# Altium PCB Controller_sensor.PcbDoc
Units mil, origin at the board's own origin, x right, y up, seen from the top; angles counter-clockwise.
Board outline 1105 x 1090 mil, 2 copper layers (Top Layer, Bottom Layer); 19 components, 22 nets, 90 pads, 31 vias.
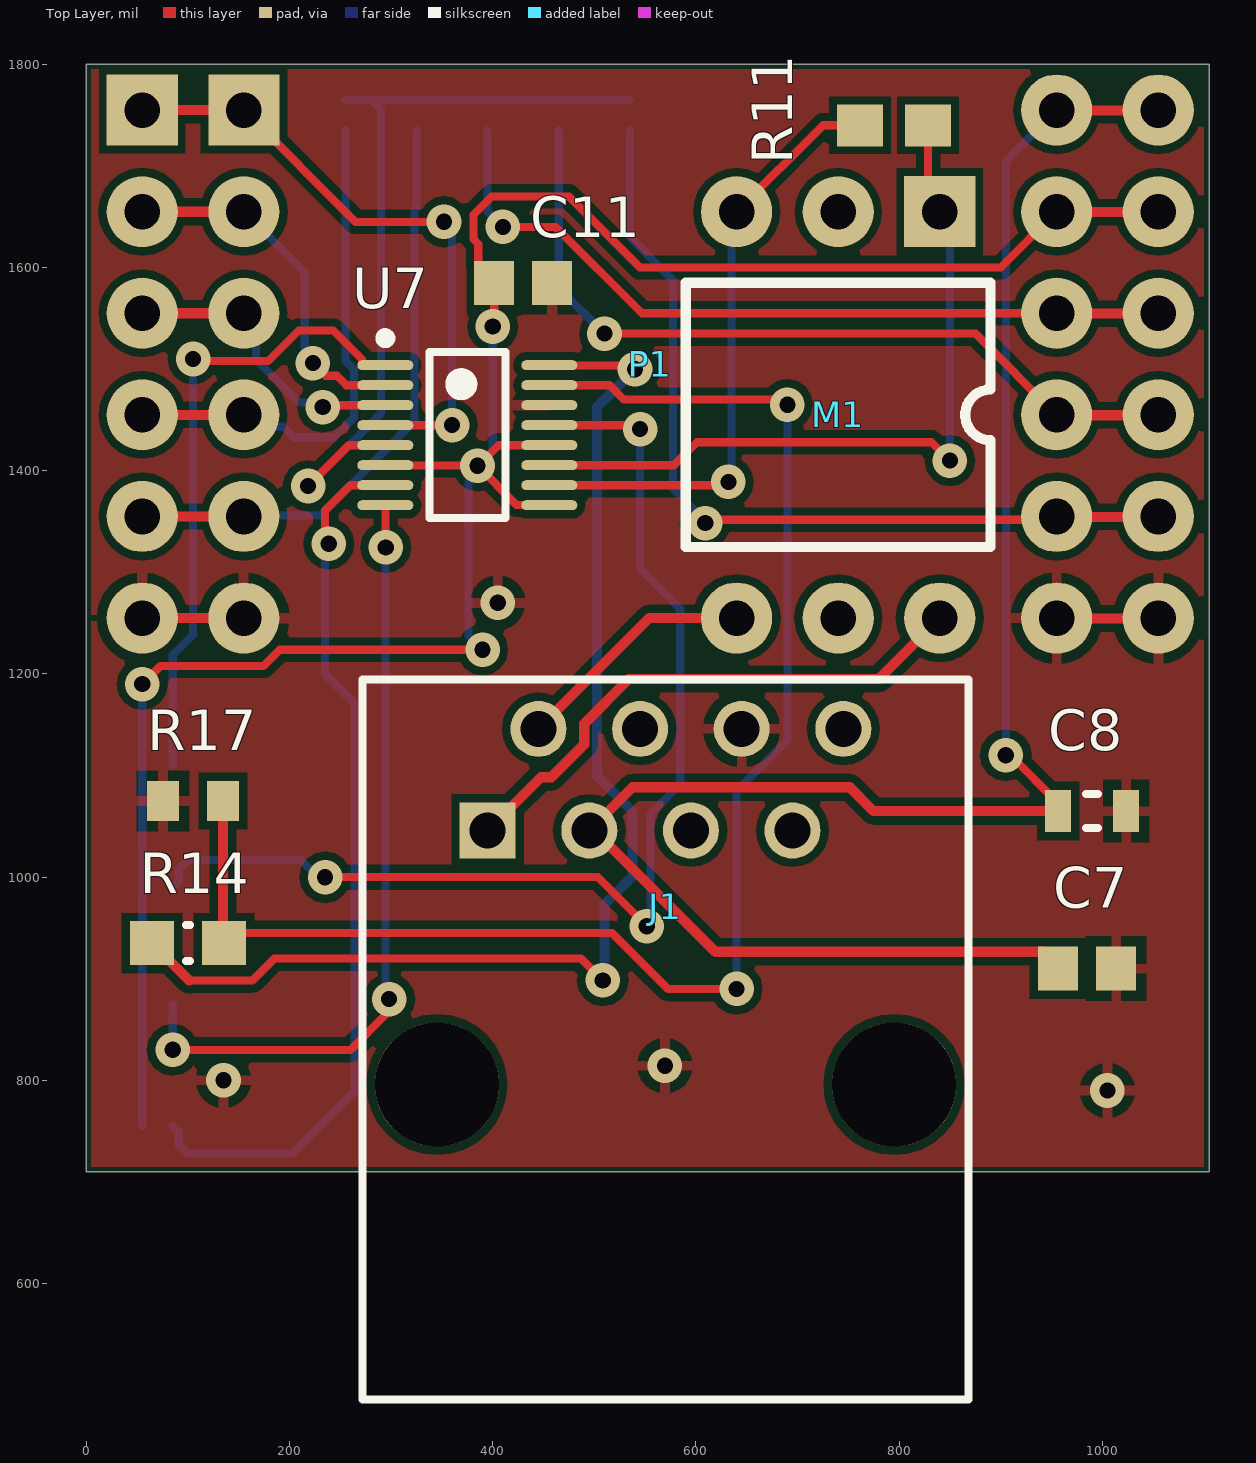
[diagram p0: Top Layer view]
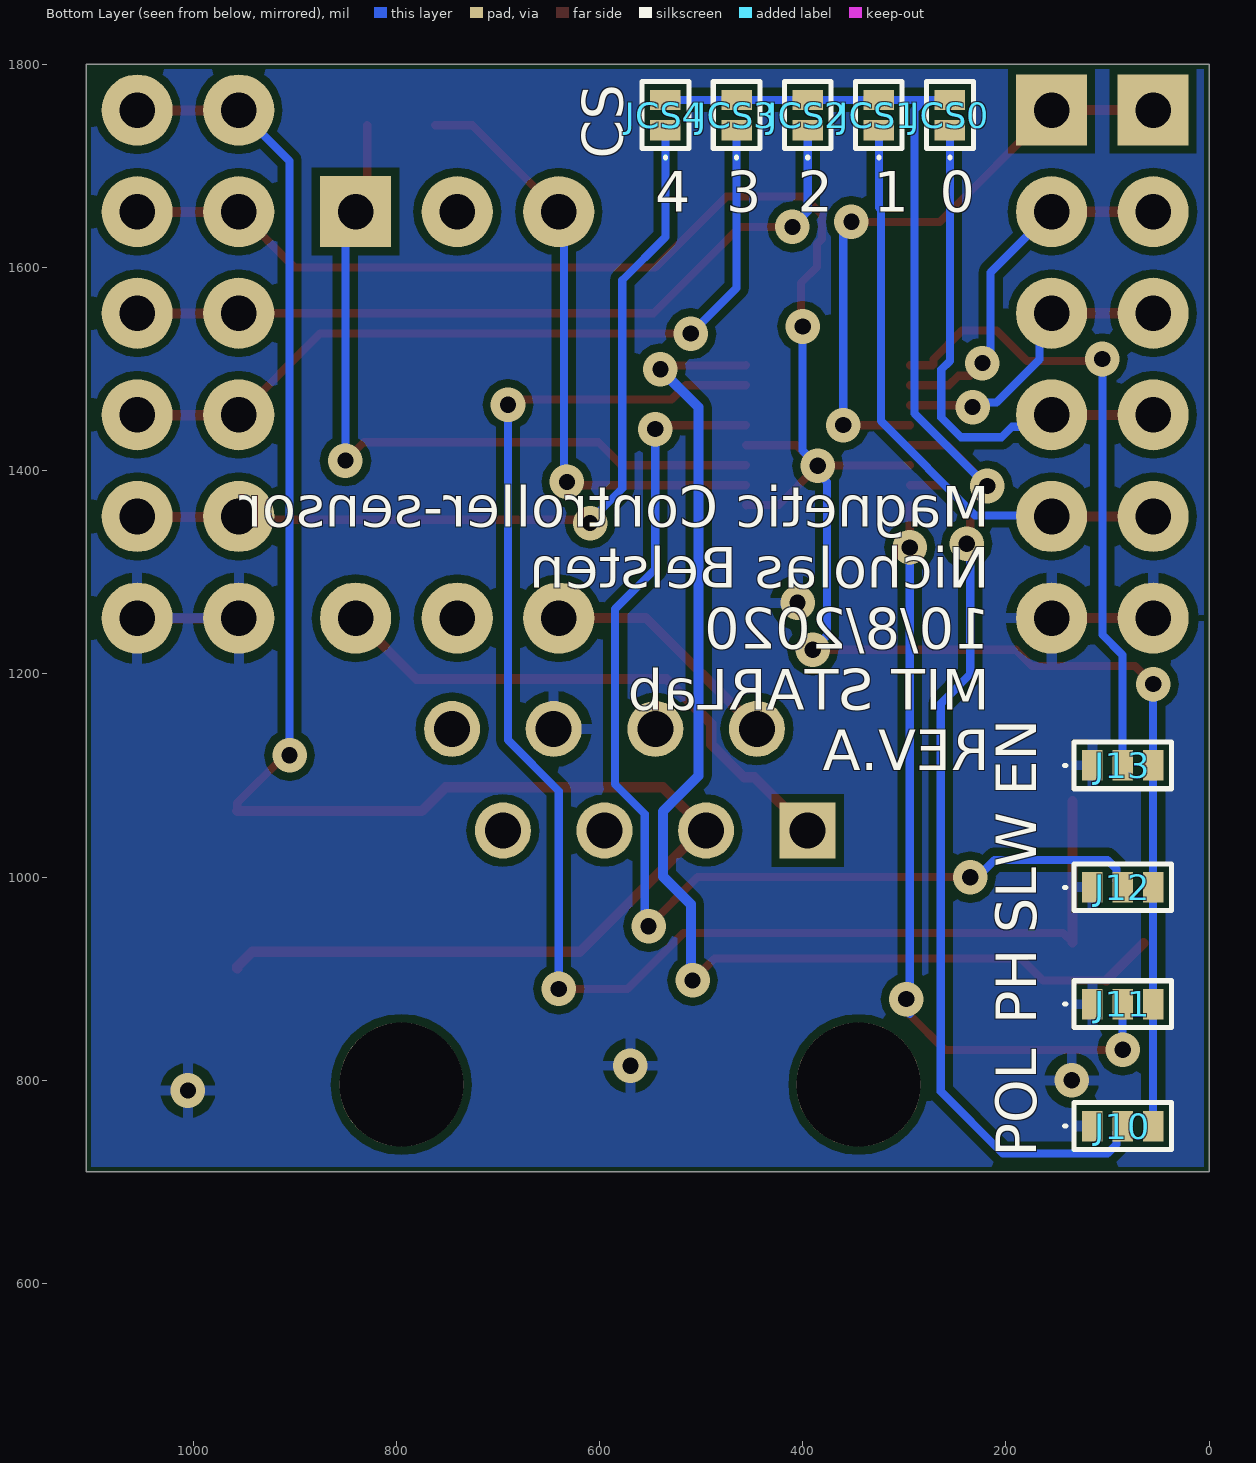
[diagram p1: Bottom Layer view, seen from below]

## Layer stack, top to bottom
Top Solder: solder mask 0.4, Solder Resist, Dk 3.5
Top Layer: signal copper 1.4
Dielectric 1: dielectric 12.6, FR-4, Dk 4.8
Bottom Layer: signal copper 1.4
Bottom Solder: solder mask 0.4, Solder Resist, Dk 3.5

## Board outline
0,710 1105,710 1105,1800 0,1800

## Design rules (kind name [scope] priority, off if disabled: settings)
Clearance [All] p1: gap=8 ignorepadtopadclearanceinfootprint=FALSE
ComponentClearance [All] p1: gap=0 collisioncheckmode=3 verticalgap=0 showdistances=FALSE
HoleSize [All] p1: absolutevalues=TRUE maxlimit=200 minlimit=10 maxpercent=80.000 minpercent=20.000
MinimumSolderMaskSliver [All] p1: minsoldermaskwidth=4
PolygonConnect [All] p1: connectstyle=Relief reliefconductorwidth=10 reliefentries=4 polygonreliefangle="90 Angle" airgapwidth=10
RoutingVias [All] p1: holewidth=16 width=34 viastyle="Through Hole" minholewidth=14 minwidth=30 maxholewidth=30 maxwidth=50
SilkToSilkClearance [All] p1: silktosilkclearance=5
SilkToSolderMaskClearance [IsPad] p1: minsilkscreentomaskgap=4 clearancetoexposedcopper=TRUE
SolderMaskExpansion SolderMaskExpansion_1 [InComponent('U7')] p1: expansion=2 istentingtop=FALSE
SolderMaskExpansion [All] p2: expansion=3 istentingtop=FALSE
Width [All] p1: maxlimit=20 minlimit=8 preferedwidth=10
25 further rules are at their usual default settings.

## Components (designator, comment, footprint, x,y, rotation, side; value= is the part's Value field where it differs from the comment)
C7 "0.1 uF" CAPC1608X87X35ML15T15 985,910 r180 top
C8 "10 uF" CAPC1608X90X20ML10 990,1065 r180 top
C11 "0.1 uF" CAPC1608X87X35ML15T15 430,1585 r180 top
J1 "615008137121" 615008137121 570,840 r0 top
J10 "solder_jumper_2" solder_jumper_2 85,755 r90 bottom
J11 "solder_jumper_2" solder_jumper_2 85,875 r90 bottom
J12 "solder_jumper_2" solder_jumper_2 85,990 r90 bottom
J13 "solder_jumper_2" solder_jumper_2 85,1110 r90 bottom
JCS0 "solder_jumper" solder_jumper 255,1785 r0 bottom
JCS1 "solder_jumper" solder_jumper 325,1785 r0 bottom
JCS2 "solder_jumper" solder_jumper 395,1785 r0 bottom
JCS3 "solder_jumper" solder_jumper 465,1785 r0 bottom
JCS4 "solder_jumper" solder_jumper 535,1785 r0 bottom
M1 "78613/3C" DIP6-400 840,1655 r270 top
P1 "dp12" "dp12-900 - double" 55,1755 r0 top
R11 "120" RESC1609X55X30ML15T15 795,1740 r0 top
R14 "2.8k" RESC0603(1608)_M 100,935 r0 top value="2800.00 Ohm"
R17 "1.2k" RESC1608X55X25ML10T15 105,1075 r0 top
U7 "LTC6820IMS#TRPBF" LT-MS-16_L 375,1435 r0 top

## Footprints (in the part's own frame and the unit in brackets; to place one, negate y for a bottom-side part, rotate by r counter-clockwise, add the part's x,y. Pads: shape width x height; smd on the part's side, far side on the other; paste and mask are expansions set on the pad)
615008137121 [mm] "Modular Jack THT Horizontal Plastic 8P8C Tab Down"
  rect 1.4x1.4 hole 0.9: 1(-4.445,5.23)
  round 1.4 hole 0.9: 2(-3.175,7.77) 3(-1.905,5.23) 4(-0.635,7.77) 5(0.635,5.23) 6(1.905,7.77) 7(3.175,5.23) 8(4.445,7.77)
  round 3.1 hole 3.1 unplated: MH1(-5.715,-1.12) MH2(5.715,-1.12)
  silkscreen extent -7.57,-9 7.57,9, body extent -7.57,-9 7.57,9, height 11.75
CAPC1608X87X35ML15T15 [mm] "Chip Capacitor, 2-Leads, Body 1.60x0.80mm, IPC Low Density"
  rect 1x1.1 smd: 1(-0.725,0) 2(0.725,0)
  body extent -0.87,-0.48 0.87,0.47, height 0.87
CAPC1608X90X20ML10 [mm] "Chip Capacitor, 2-Leads, Body 1.70x0.90mm, IPC Low Density"
  rect 0.65x1.05 smd: 1(-0.85,0) 2(0.85,0)
  silkscreen extent -0.15,-0.43 0.15,0.43, body extent -0.85,-0.45 0.85,0.45, height 0.9
DIP6-400 [mil]
  rect 70x70 hole 35: 1(0,0)
  round 70 hole 35: 2(0,-100) 3(0,-200) 4(400,-200) 5(400,-100) 6(400,0)
  silkscreen extent 70,-250 330,50, body extent 10,-275 390,65, height 250
"dp12-900 - double" [mil]
  rect 70x70 hole 35: 1(0,0) 1(100,0)
  round 70 hole 35: 2(0,-100) 2(100,-100) 3(0,-200) 3(100,-200) 4(0,-300) 4(100,-300) 5(0,-400) 5(100,-400) 6(0,-500) 6(100,-500) 7(900,-500) 7(1000,-500) 8(900,-400) 8(1000,-400) 9(900,-300) 9(1000,-300) 10(900,-200) 10(1000,-200) 11(900,-100) 11(1000,-100) 12(900,0) 12(1000,0)
  Top Layer lines w10: 0,-500 100,-500 ; 0,-400 100,-400 ; 0,-300 100,-300 ; 0,-200 100,-200 ; 0,-100 100,-100 ; 0,0 100,0 ; 900,-500.39 999.82,-500.39 ; 900,-400.39 999.82,-400.39 ; 900,-300.39 999.82,-300.39 ; 900,-200.39 999.82,-200.39 ; 900,-100.39 999.82,-100.39 ; 900,-0.39 999.82,-0.39
LT-MS-16_L [mm] "SOP, 16-Leads, Body 4.04x3.00mm, Pitch 0.50mm, IPC High Density"
  oval 1.4x0.25 smd: 1(-2.05,1.75) 2(-2.05,1.25) 3(-2.05,0.75) 4(-2.05,0.25) 5(-2.05,-0.25) 6(-2.05,-0.75) 7(-2.05,-1.25) 8(-2.05,-1.75) 9(2.05,-1.75) 10(2.05,-1.25) 11(2.05,-0.75) 12(2.05,-0.25) 13(2.05,0.25) 14(2.05,0.75) 15(2.05,1.25) 16(2.05,1.75)
  silkscreen extent -2.17,-2.08 0.95,2.55, body extent -1.55,-2.05 1.55,2.05, height 1.1
RESC0603(1608)_M [mm] "Chip Resistor, Body 1.6x0.8mm, IPC Low Density"
  rect 1.1x1.1 smd: 1(-0.9,0) 2(0.9,0)
  silkscreen extent -0.05,-0.45 0.05,0.45, body extent -0.85,-0.47 0.85,0.47, height 0.6
RESC1608X55X25ML10T15 [mm] "Chip Resistor, 2-Leads, Body 1.60x0.80mm, IPC Low Density"
  rect 0.8x1 smd: 1(-0.75,0) 2(0.75,0)
  body extent -0.85,-0.45 0.85,0.45, height 0.55
RESC1609X55X30ML15T15 [mm] "Chip Resistor, 2-Leads, Body 1.75x0.95mm, IPC Low Density"
  rect 1.15x1.05 smd: 1(-0.85,0) 2(0.85,0)
  body extent -0.87,-0.48 0.87,0.48, height 0.55
solder_jumper [mil]
  rect 30x20 smd: 0(0,20) 1(0,50)
  silkscreen extent -23,2 23,77
solder_jumper_2 [mil]
  rect 30x20 smd: 0(0,0) 1(0,30) 2(0,-30)
  silkscreen extent -23,-48 23,57

## Part data
C7 C11: library part CMP-2006-03300-1, Manufacturer=Kemet, Part Number=C0603X104K5RACTU
C8: library part CMP-2000-04979-1, "Chip Capacitor, 10 uF, +/- 10%, 10 V, -55 to 85 degC, 0603 (1608 Metric), RoHS, Tape and Reel", Capacitance=10µF, Manufacturer=TDK, Operating Temperature=-55degC~85degC, Package / Case=0603(1608Metric), Package Description="2-Pin Surface Mount Device, Body 1.6 x 0.8 mm", Package Reference=603, PCN Part Number=MLCCPartNumberChange30/Nov/2012, Ratings=-, Standard Package=1, Temperature Coefficient=X5R, Tolerance=±10%, Voltage - Rated=10V, Applications=GeneralPurpose, Category=Capacitors, Datasheet URL=http://download.siliconexpert.com/pdfs/2015/4/21/15/54/45/779/tdk_/manual/37024850441143360mlcc_commercial_general_en.pdf, Datasheet Version=Mar-15, Design Resources=20WNon-IsolatedBuckLEDDriverUsingPLLNK460KG, Family=CeramicCapacitors, Features=-, Height - Seated (Max)=-, Kits=445-9003-KIT-ND-KITCAPCERHICAPMLCCSMD, Lead Spacing=-, Lead Style=-, Manufacturer URL=http://www.tdk.com/, Mounting Type=SurfaceMount,MLCC, Online Catalog=CSeries,GeneralPurpose, Other Names=445-7486-1, Packaging=CutTape(CT), Product Training Modules=CSeriesGeneralApplicationsSEAT,CCV,andTVCLDesignToolsGuidetoReplacinganElectrolyticCapacitorwithanMLCC, RoHS Information=RoHSCertificate-MLCC, Series=C, Size / Dimension="0.063\"Lx0.031\"W(1.60mmx0.80mm)", Thickness (Max)="0.035\"(0.90mm)"
J1: library part CMP-1502-01679-1, "Modular Jack WR-MJ, Tab Down, Plastic, Horizontal Entry, THT, 8P8C", Contact Resistance=20mOhm, Manufacturer="Wurth Elektronik", Operating Temperature=-40to85degC, Rated Current=1.5A, Withstanding Voltage=1000VAC, Working Voltage=120VAC, Compliance=Leadfree/RoHS, Datasheet URL=https://katalog.we-online.com/em/datasheet/615008137121.pdf, Entrance=Horizontal, Manufacturer URL=http://www.we-online.de, Mounting Technology=THT, Package Reference=615008137121, Packaging=Tray, Part Number=615008137121, Pin Number=8P8C, Port=1x1, Publisher=WurthElektronik
R11: library part CMP-2100-03629-1, "Chip Resistor, 120 Ohm, +/- 1%, 0.1 W, -55 to 155 degC, 0603 (1608 Metric), RoHS, Tape and Reel", Case Code (Imperial)=0603, Case Code (Metric)=1608, Manufacturer=Panasonic, Max Operating Temperature=155degC, Max Power Dissipation=100mW, Min Operating Temperature=-55degC, Package Description="2-Pin Surface Mount Device, Body 1.6 x 0.85 mm", Package Quantity=1, Resistance=120Ohm, Temperature Coefficient=100ppm/degreesC, Tolerance=1%, Voltage Rating=75V, Case/Package=0603, Composition=ThickFilm, Contact Plating=Tin, Datasheet URL=https://industrial.panasonic.com/cdbs/www-data/pdf/RDA0000/AOA0000C283.pdf, Datasheet Version=42095.0, Depth=0.8mm, Height=0.022inch, Lead Free=LeadFree, Length=1.6mm, Manufacturer URL=http://www.panasonic.com/, Military Standard=Not, Mount=SurfaceMount, Number of Pins=2, Number of Terminations=2, Package Reference=0603, Package URL=http://www.st.com/st-web-ui/static/active/en/resource/technical/document/datasheet/CD00001320.pdf, Packaging=TapeandReel, Power Rating=100mW, Radiation Hardening=No, REACH SVHC=NoSVHC, RoHSCompliant=true, Termination=SMD/SMT, Voltage Rating (DC)=75V, Width=0.031inch
R14: library part CMP-1012-00559-1, "2K8 0.1W 1% 0603 (1608 Metric)  SMD", Case-EIA=0603, Case-Metric=1608, Power="0.1 W", Tolerance="1 %", Technology=SMT
R17: library part CMP-2000-04824-1, Manufacturer=Yageo, Part Number=AC0603FR-071K2L
U7: library part CMP-0937-00011-1, "IsoSPI Isolated Communication Interface, 2.7 to 5.5 V, -40 to 85 degC, 16-Pin MSOP (MS), Pb-Free, Tape and Reel", IO Supply Current="1 uA Max.", IO Supply Voltage Range="1.7 to 5.5 V", Manufacturer="Linear Technology", Power Supply="2.7 to 5.5 V", Receiver Input Resistance="35 kOhm", Supply Current, IDLE State="2 uA", Temperature Range (degC)="-40 to 85", ComponentLink1Description="Manufacturer URL", ComponentLink1URL=http://www.linear.com/, ComponentLink2Description=Datasheet, ComponentLink2URL=http://cds.linear.com/docs/en/datasheet/6820fa.pdf, ComponentLink3Description="Package Specification", ComponentLink3URL=http://cds.linear.com/docs/en/packaging/05081669_A_MS16.pdf, DatasheetVersion="Rev. A", Mounting Technology="Surface Mount", PackageDescription="16-Pin Micro Small Outline Package, Body 4.039 x 3 mm, Pitch 0.5 mm", PackageReference=MS-16, PackageVersion="Rev. A", Packing="Tape and Reel", PartNumber=LTC6820IMS#TRPBF, VBIAS="1.9 to 2.1 V"

## Via types
v1: diameter 34, hole 16, Top Layer to Bottom Layer, 31 vias

## Nets (pads, with @x,y where several pads share a name; then routed paths per layer and width w, separated by ;. In a path a pad name is that pad's centre, name@x,y a point inside that pad or via, vN(x,y) a via of type N, cw(c..) or ccw(c..) an arc to the next point about the centre after c; other vN are vias at no path point)
3V3: C11.2 J10.2 J11.2 J12.2 J13.2 P1.11 U7.6 U7.9 U7.12 | length 2127.1
  Top Layer w8: v1(55,1190) 73,1208 174.47,1208 190.23,1223.76 v1(390,1223.76) ; U7.6 294.53,1405.24 384.76,1405.24 v1(385,1405) ; v1@400,1540 401.46,1541.46 C11.2 385.77,1600.69 385.77,1623.22 381,1627.99 381,1652.01 398.99,1670 475,1670 545,1600 900,1600 P1.11@955,1655 ; U7.9 455.36,1366.45 423.55,1366.45 v1(385,1405) ; U7.12 405.85,1425.16 385.7,1405 v1(385,1405)
  Bottom Layer w8: J10.2 J11.2 J12.2 J13.2 v1(55,1190) ; v1(390,1223.76) 376,1237.76 376,1388.96 385,1397.96 v1(385,1405) 400,1420 v1@400,1540
  other v1: 400,1542
5V: C7.2 C8.2 J1.3 P1.12 | length 1742.4
  Top Layer w8: v1(905,1120) 909.41,1120 956.54,1072.87 C8.2
  Top Layer w10: C7.2 956.46,911.97 941.77,926.65 619.11,926.65 499.86,1045.91 J1.3 537.56,1088.46 751.32,1088.46 774.79,1065 C8.2
  Bottom Layer w8: v1(905,1120) 905,1705 P1.12@955,1755
CS_0: JCS0.1 P1.4 | length 411.7
  Bottom Layer w8: P1.4@155,1455 166.67,1443.33 193.79,1443.33 204.12,1433 244.01,1433 263.53,1452.52 263.53,1499.49 255,1508.02 JCS0.1
CS_1: JCS1.1 P1.5 | length 493.9
  Bottom Layer w8: P1.5@155,1355 156,1356 230.2,1356 323,1448.8 323,1657.01 325,1659.01 JCS1.1
CS_2: JCS2.1 P1.10 | length 681.4
  Top Layer w8: v1(410,1640) 461.85,1640 546.85,1555 P1.10@955,1555
  Bottom Layer w8: JCS2.1 395,1655 v1(410,1640)
CS_3: JCS3.1 P1.9 | length 696.8
  Top Layer w8: v1(510,1535) 875,1535 P1.9@955,1455
  Bottom Layer w8: JCS3.1 465,1580 v1(510,1535)
CS_4: JCS4.1 P1.8 | length 765.7
  Top Layer w8: v1(609.16,1348.53) 612.4,1351.77 951.77,1351.77 P1.8@955,1355
  Bottom Layer w8: JCS4.1 535,1630 577.5,1587.5 577.5,1382.5 609.16,1350.84 v1(609.16,1348.53)
CS_L: JCS0.0 JCS1.0 JCS2.0 JCS3.0 JCS4.0 U7.5 | length 784.4
  Top Layer w8: v1(218.18,1385) 258.34,1425.16 U7.5
  Bottom Layer w8: v1(218.18,1385) 218.64,1385 290,1456.36 290,1755.31 282,1763.31 ; JCS0.0 282,1765 JCS1.0 JCS2.0 JCS3.0 JCS4.0
EN: J13.0 U7.1 | length 627.9
  Top Layer w8: v1(105,1510) 107,1508 179.01,1508 209.01,1538 243,1538 271.3,1509.7 271.3,1504.75 272.15,1503.9 U7.1
  Bottom Layer w8: J13.0 85,1218.53 105,1238.53 v1(105,1510)
GND: C7.1 C8.1 C11.1 J1.6 J10.1 J11.1 J12.1 J13.1 P1.6 P1.7 R17.1 U7.14 | length 0.4
  Bottom Layer w8: v1@569.49,814.09 v1(569.49,814.49)
  other v1: 1005,790 135,800 405,1270
IM0: J1.2 M1.4 | length 240.2
  Top Layer w10: J1.2 554.09,1255 M1.4
IP0: J1.1 M1.6 | length 543.5
  Top Layer w10: J1.1 447.47,1098.37 457.65,1098.37 490,1130.72 490,1151.09 533.91,1195 780,1195 M1.6
MISO: P1.3 U7.3 | length 197.9
  Top Layer w8: v1(232.72,1462.72) 234.53,1464.53 U7.3
  Bottom Layer w8: P1.3@155,1555 166.86,1543.14 166.86,1509.6 209.23,1467.23 228.2,1467.23 v1(232.72,1462.72)
MOSI: P1.2 U7.2 | length 257.5
  Top Layer w8: v1(223,1506) 235.47,1493.53 246.54,1493.53 255.85,1484.21 U7.2
  Bottom Layer w8: P1.2@155,1655 215,1595 215,1514 v1(223,1506)
NetM1_1: M1.1 R11.2 U7.11 | length 750
  Top Layer w8: U7.11 578.47,1405.47 601,1428 832,1428 v1(850,1410) ; R11.2 828.46,1666.54 M1.1
  Bottom Layer w8: M1.1 850,1645 v1(850,1410)
NetM1_3: M1.3 R11.1 U7.10 | length 606.7
  Top Layer w8: U7.10 629.21,1385.79 630,1385 v1@632,1385 ; M1.3 725,1740 R11.1
  Bottom Layer w8: v1@632,1385 632,1387 634.97,1389.97 634.97,1649.97 M1.3
  other v1: 632,1389
NetR14_1: R14.1 U7.16 | length 1204.3
  Top Layer w8: 101.22,898.35 163.35,898.35 185,920 486.69,920 v1(508.35,898.35) ; U7.16 456.06,1503.55 536.45,1503.55 v1(540,1500)
  Top Layer w10: R14.1 101.22,898.35
  Bottom Layer w10: v1@510,900 510,973.4 537.56,1000.96 537.56,1064.69 502.44,1099.81 502.44,1462.44 v1(540,1500)
NetR14_2: R14.2 R17.2 U7.15 | length 1509.1
  Top Layer w8: R14.2@134.53,935.91 143.62,945 517.33,945 572.33,890 v1(640,890) ; U7.15 514.78,1484.21 528.99,1470 685,1470 v1(690,1465)
  Top Layer w10: R14.2@134.53,935.91 R17.2
  Bottom Layer w8: v1(640,890) 640,1084.96 690,1134.96 v1(690,1465)
SCLK: P1.1 U7.4 | length 512.8
  Top Layer w8: P1.1@155,1755 265,1645 v1(352,1645) ; U7.4 359.84,1444.84 v1(360,1445)
  Bottom Layer w8: v1(352,1645) 354,1645 360,1639 v1(360,1445)
SPI_PHA: J11.0 U7.8 | length 770.5
  Top Layer w8: v1(85,830) 260,830 294.57,864.57 v1@294.57,865.6 ; U7.8 294.57,1365.82 v1(294.57,1324.57)
  Bottom Layer w8: v1(85,830) J11.0 ; v1@294.57,865.6 v1(294.57,1324.57)
  other v1: 298,880
SPI_POL: J10.0 U7.7 | length 878.8
  Top Layer w8: v1(238.53,1328.22) 235,1331.76 235,1360.8 259.98,1385.79 U7.7
  Bottom Layer w8: J10.0 91,749 91,737.03 100.03,728 203,728 264,789 264,1170.98 235,1199.98 235,1324.69 v1(238.53,1328.22)
SPI_SLOW: J12.0 U7.13 | length 1122.1
  Top Layer w8: v1(235,1000) 503.34,1000 v1(551.67,951.67) ; U7.13 541.16,1444.84 v1(545,1441)
  Bottom Layer w8: J12.0 91,996 91,1007.97 100.03,1017 210.99,1017 227.99,1000 v1(235,1000) ; v1(545,1441) 545,1303.52 584.56,1263.96 584.56,1091.41 555.44,1062.29 555.44,955.44 v1(551.67,951.67)
pads on no net: J1.4 J1.5 J1.7 J1.8 J1.MH1 J1.MH2 M1.2 M1.5

## Polygon pours and split planes (outlines as drawn)
GND on Bottom Layer "top_solder_thermal" (solid, pour order 1): 5,1795 5,715 1100,715 1100,1795
GND on Top Layer "top_solder_thermal" (solid, pour order 0): 5,1795 5,715 1100,715 1100,1795

## Silkscreen, mask and mechanical layers (free items; w line width, h text height)
Bottom Overlay:
  text "CS" at 577.24,1707 h40 r270
  text "0" at 265,1655 h40
  text "1" at 330,1655 h40
  text "2" at 405,1655 h40
  text "3" at 475,1655 h40
  text "4" at 545,1655 h40
  text "Magnetic Controller-sensor / Nicholas Belsten / 10/8/2020 / MIT STARLab / REV.A" at 216,1105 h40
  text "EN" at 170,1080 h40 r270
  text "SLW" at 170,945 h40 r270
  text "PH" at 170,855 h40 r270
  text "POL" at 170,725 h40 r270
Mechanical 2 (Mech4):
  lines w10: 0,710 1105,710 1105,1800 1104.63,1800.37 1.36,1800.37 0,1799 0,710